# EAGLE board ECE445-Transmitter-Schematic (EAGLE 7.5.0)
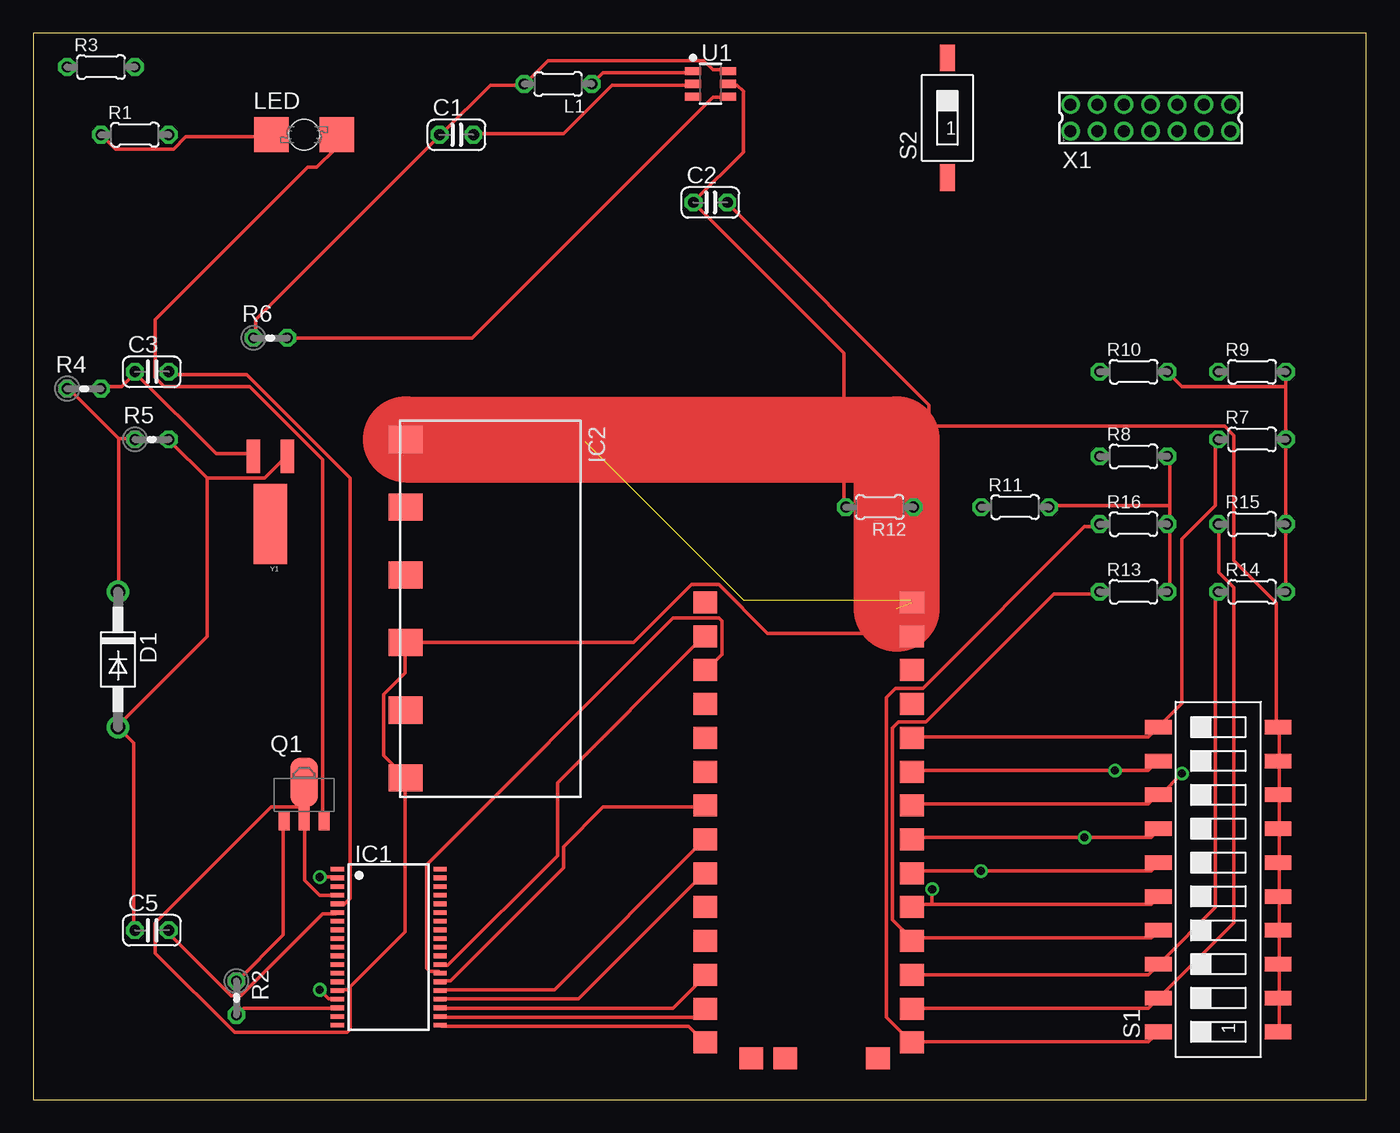
[diagram p0: board, top side]
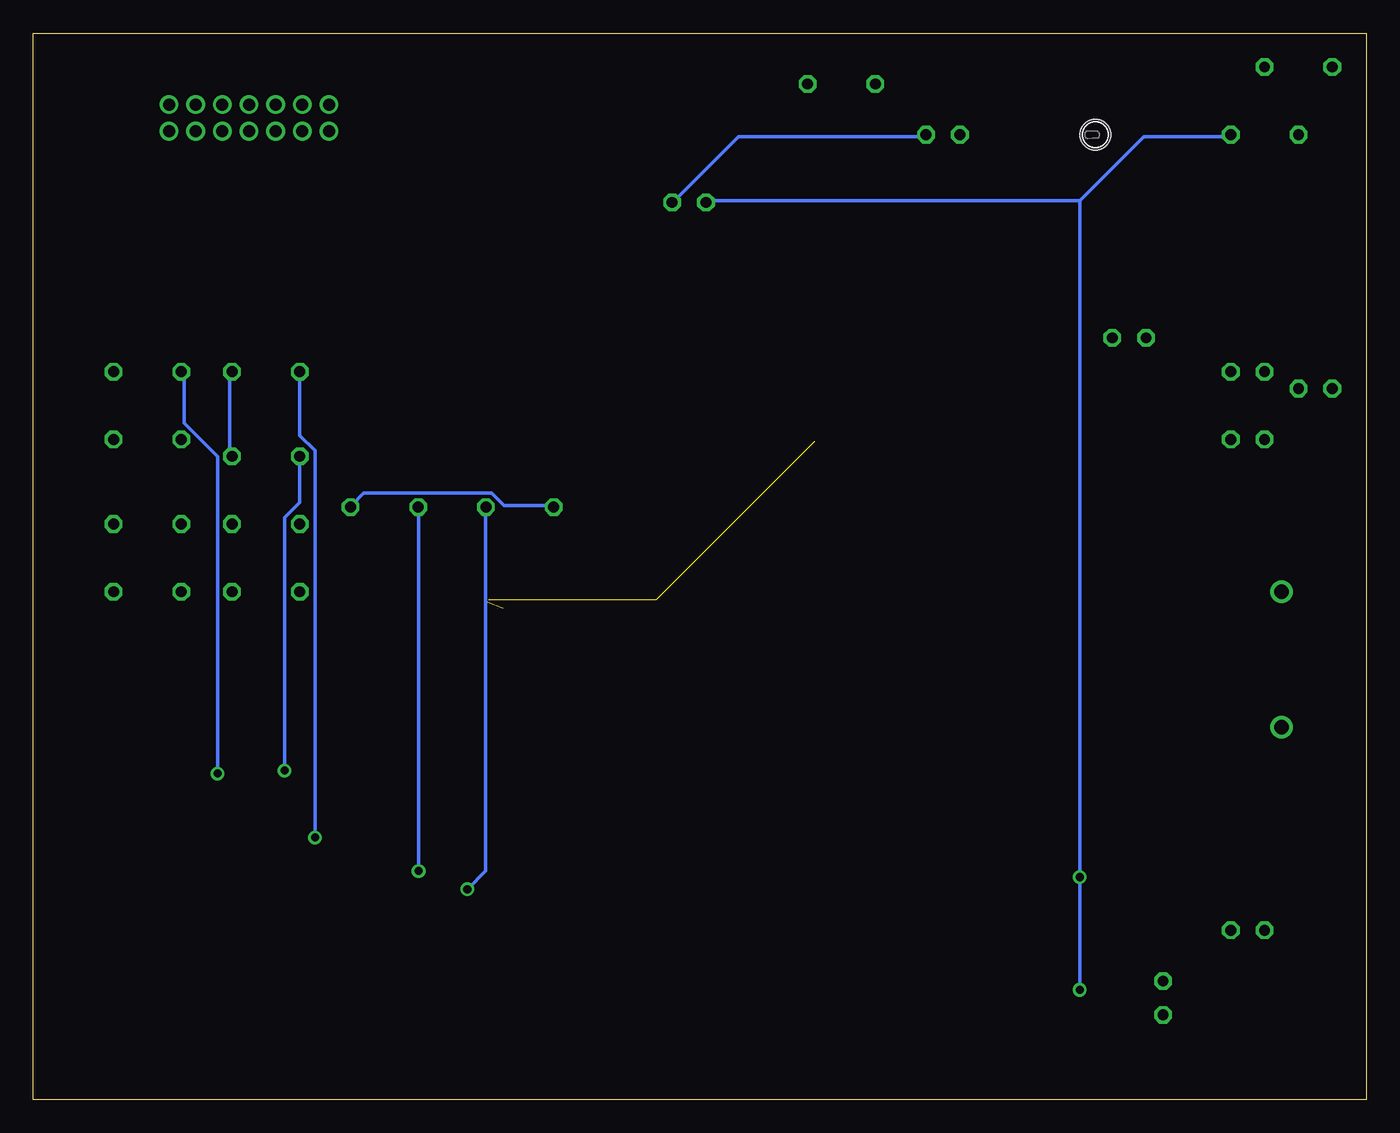
[diagram p1: board, bottom side, seen from below]

Size 100 x 80 mm. Coordinates in mm from the lower left corner, seen from the top.
Outline: 0,0 100,0 100,80 0,80 0,0
Copper layers (1*16): Top 0.035mm / dielectric 1.5mm / Bottom 0.035mm
Design rules "default": minimum track width 10mil, minimum drill 24mil, track to track 8mil, track to pad 8mil, pad to pad 8mil, via to via 8mil, smd to smd 8mil, copper to edge 40mil, drill to drill 8mil, minimum pad ring 10mil, minimum via ring 8mil, stop-mask expansion 4mil, vias tented up to drill 0mil, thermal gap 10mil

## Footprints (pad centres in the part's own frame; a part is rotated, then mirrored left to right if it is on the bottom)
C025-024X044 = drill 0.813 octagon: 1 -1.27,0; 2 1.27,0
DO41-10 = drill 1.118: A 5.08,0; C -5.08,0
TSSOP38_R-PDSO-G38-DA = smd 0.35 x 1: 1 -5.85,-3.85; 2 -5.2,-3.85; 3 -4.55,-3.85; 4 -3.9,-3.85; 5 -3.25,-3.85; 6 -2.6,-3.85; 7 -1.95,-3.85; 8 -1.3,-3.85; 9 -0.65,-3.85; 10 0,-3.85; 11 0.65,-3.85; 12 1.3,-3.85; 13 1.95,-3.85; 14 2.6,-3.85; 15 3.25,-3.85; 16 3.9,-3.85; 17 4.55,-3.85; 18 5.2,-3.85; 19 5.85,-3.85; 20 5.85,3.85; 21 5.2,3.85; 22 4.55,3.85; 23 3.9,3.85; 24 3.25,3.85; 25 2.6,3.85; 26 1.95,3.85; 27 1.3,3.85; 28 0.65,3.85; 29 0,3.85; 30 -0.65,3.85; 31 -1.3,3.85; 32 -1.95,3.85; 33 -2.6,3.85; 34 -3.25,3.85; 35 -3.9,3.85; 36 -4.55,3.85; 37 -5.2,3.85; 38 -5.85,3.85
ANT-XXX-SP = smd 2.032 x 2.54: 1 -12.7,0; 2 -7.62,0; 3 -2.54,0; 4 2.54,0; 5 7.62,0; 6 12.7,0
0204/5 = drill 0.813 octagon: 1 -2.54,0; 2 2.54,0
P47F-BOTTOM = smd 2.6 x 2.6: A -2.45,0; C 2.45,0 | hole 2.3: 0,0
SOT89 = smd 0.8 x 1.4: 1 -1.499,-1.981; 3 1.499,-1.981 | smd 0.8 x 1.9: 2 0,-1.727 | smd 2.032 x 3.65: 2@1 0,0.94
0204V = drill 0.813 octagon: 1 -1.27,0; 2 1.27,0
SMS-010 = smd 1.092 x 2.007: 1 -11.43,-4.496; 2 -8.89,-4.496; 3 -6.35,-4.496; 4 -3.81,-4.496; 5 -1.27,-4.496; 6 1.27,-4.496; 7 3.81,-4.496; 8 6.35,-4.496; 9 8.89,-4.496; 10 11.43,-4.496; 11 11.43,4.496; 12 8.89,4.496; 13 6.35,4.496; 14 3.81,4.496; 15 1.27,4.496; 16 -1.27,4.496; 17 -3.81,4.496; 18 -6.35,4.496; 19 -8.89,4.496; 20 -11.43,4.496
SMS-001 = smd 1.092 x 2.007: 1 0,-4.496; 2 0,4.496
TSOT-23-6 = smd 1.22 x 0.62: 1 -1.31,0.95; 2 -1.31,0; 3 -1.31,-0.95; 4 1.31,-0.95; 5 1.31,0; 6 1.31,0.95
KH3-RXM-LINX-315 = smd 1.78 x 1.65: 1 -8,19.52; 2 -8,16.98; 3 -8,14.44; 4 -8,11.9; 5 -8,9.36; 6 -8,6.82; 7 -8,4.28; 8 -8,1.74; 9 -8,-0.8; 10 -8,-3.34; 11 -8,-5.88; 12 -8,-8.42; 13 -8,-10.96; 14 -8,-13.5; 15 7.49,-13.5; 16 7.49,-10.96; 17 7.49,-8.42; 18 7.49,-5.88; 19 7.49,-3.34; 20 7.49,-0.8; 21 7.49,1.74; 22 7.49,4.28; 23 7.49,6.82; 24 7.49,9.36; 25 7.49,11.9; 26 7.49,14.44; 27 7.49,16.98; 28 7.49,19.52; 29 -4.55,-14.67; 30 -2.01,-14.67; 31 4.95,-14.67
87758-1416 = drill 0.9 pad 1.27: 1 -6,-1; 2 -6,1; 3 -4,-1; 4 -4,1; 5 -2,-1; 6 -2,1; 7 0,-1; 8 0,1; 9 2,-1; 10 2,1; 11 4,-1; 12 4,1; 13 6,-1; 14 6,1
CRYSTAL-32KHZ-SMD-MELF = smd 2.5 x 6: SHEILD 0,5.08 | smd 1 x 2.5: X1 -1.27,0; X2 1.27,0

## Placement (x,y rotation side)
C1  [C025-024X044]  31.75,72.39 0 top
C2  [C025-024X044]  50.8,67.31 0 top
C3  22 pF  [C025-024X044]  8.89,54.61 0 top
C5  22 pF  [C025-024X044]  8.89,12.7 0 top
D1  [DO41-10]  6.35,33.02 270 top
IC1  MSP430F2274IDA  [TSSOP38_R-PDSO-G38-DA]  26.67,11.43 270 top
IC2  ANT-XXX-SP  [ANT-XXX-SP]  27.94,36.83 270 top
L1  [0204/5]  39.37,76.2 180 top
LED  [P47F-BOTTOM]  20.32,72.39 0 top
Q1  [SOT89]  20.32,22.86 0 top
R1  1.3 kohm  [0204/5]  7.62,72.39 0 top
R2  10 kohm  [0204V]  15.24,7.62 270 top
R3  1.3 kohm  [0204/5]  5.08,77.47 0 top
R4  33 kohm  [0204V]  3.81,53.34 0 top
R5  100 Mohm  [0204V]  8.89,49.53 0 top
R6  100 Mohm  [0204V]  17.78,57.15 0 top
R7  1.3 kohm  [0204/5]  91.44,49.53 0 top
R8  1.3 kohm  [0204/5]  82.55,48.26 0 top
R9  1.3 kohm  [0204/5]  91.44,54.61 0 top
R10  1.3 kohm  [0204/5]  82.55,54.61 0 top
R11  1.3 kohm  [0204/5]  73.66,44.45 0 top
R12  1.3 kohm  [0204/5]  63.5,44.45 180 top
R13  1.3 kohm  [0204/5]  82.55,38.1 0 top
R14  1.3 kohm  [0204/5]  91.44,38.1 0 top
R15  1.3 kohm  [0204/5]  91.44,43.18 0 top
R16  1.3 kohm  [0204/5]  82.55,43.18 0 top
S1  SWS010  [SMS-010]  88.9,16.51 90 top
S2  SWS001  [SMS-001]  68.58,73.66 0 top
U1  AAT1217ICA-3.3-T1  [TSOT-23-6]  50.8,76.2 0 top
U$1  KH3-RXM-LINX-315  [KH3-RXM-LINX-315]  58.42,17.78 0 top
X1  87758-1416  [87758-1416]  83.82,73.66 0 top
Y1  [CRYSTAL-32KHZ-SMD-MELF]  17.78,48.26 180 top

## Library data of the parts
C1-C3 C5 L1 R1-R16 = rcl
D1 = diode
IC1 = texas; MPN: MSP430F2274IDA; OC_FARNELL: 1610179; OC_NEWARK: 28M6350
IC2 = linx; OC_FARNELL: unknown; OC_NEWARK: unknown
LED = led
Q1 = semicon-smd-ipc
S1 S2 = smd-special
U1 = Skyworks
U$1 = KH3-RXM-LINX-315
X1 = 14-pin-ribbon; MF: MOLEX; MPN: 87758-1416; OC_FARNELL: 7472358; OC_NEWARK: 59J1562
Y1 = SparkFun-FreqCtrl; PROD_ID: XTAL-07894

## Nets
+3V3: C1.1 L1.2 R6.1 U1.6
GND: C1.2 C2.2 IC1.4 IC1.15 IC2.4 IC2.6 Q1.2 Q1.2@1 S1.1 S1.2 S1.3 S1.4 S1.5 S1.6 S1.7 S1.8 S1.9 S1.10 U1.2 U$1.27
N$1: LED.C Q1.3
N$2: LED.A R1.1
N$3: IC1.17 R2.2
N$4: C5.2 IC1.6
N$5: C3.2 IC1.5
N$6: C3.1 R4.2 Y1.X2
N$7: Q1.1 R2.1
N$8: D1.C R4.1 R5.1
N$9: IC2.1 U$1.28
N$10: L1.1 U1.1
N$11: C2.1 IC1.2 IC1.16 R1.2 R7.2 R8.2 R9.2 R10.2 R11.2 R12.2 R13.2 R14.2 R15.2 R16.2 U1.5
N$12: C5.1 D1.A R5.2 Y1.X1
N$13: U$1.25
N$15: R15.1 S1.19 U$1.16
N$16: R14.1 S1.18 U$1.17
N$17: R13.1 S1.17 U$1.18
N$18: R12.1 S1.16 U$1.19
N$19: R6.2 U1.4
N$20: R11.1 S1.15 U$1.20
N$21: R10.1 S1.14 U$1.21
N$22: IC1.20 U$1.14
N$23: IC1.21 U$1.13
N$24: IC1.22 U$1.12
N$25: IC1.23 U$1.9
N$26: IC1.24 U$1.8
N$27: IC1.25 U$1.7
N$28: IC1.26 U$1.3
N$29: IC1.27 U$1.2
N$30: R9.1 S1.13 U$1.22
N$31: R8.1 S1.12 U$1.23
N$32: R7.1 S1.11 U$1.24
N$33: R16.1 S1.20 U$1.15

## Tracks (layer width: path | path; a pad name or v marks a point on that pad's centre or on a via)
+3V3
  Top 0.254: U1.6 51.89,77.27 50.98,77.27 50.29,77.95 38.63,77.95 37.03,76.35 L1.2 36.8,76.12 34.29,76.12 30.63,72.47 C1.1 30.4,72.24 16.69,58.52 16.69,57.15 R6.1
GND
  Top 0.254: IC1.4 22.63,15.32 21.49,15.32 20.34,16.46 20.34,21.03 Q1.2 | 20.34,21.95 20.34,21.26 Q1.2 | 20.34,21.95 20.34,23.77 Q1.2@1 | 23.77,8.46 27.89,12.57 27.89,24 IC2.6 27.89,24.23 26.29,25.83 26.29,30.4 27.89,32 27.89,34.29 IC2.4 45.03,34.29 49.38,38.63 51.44,38.63 55.09,34.98 65.84,34.98 U$1.27 66.06,34.98 67.21,36.12 67.21,50.52 | 23.77,8.46 23.55,8.23 22.86,8.23 IC1.15 | 20.34,21.95 17.83,21.95 9.14,13.26 9.14,10.97 15.09,5.03 23.55,5.03 23.77,5.26 23.77,8.46 | 20.34,21.95 Q1.2 | 93.5,22.86 93.5,25.38 S1.9 93.5,25.6 93.5,27.89 S1.10 93.27,28.12 93.27,37.26 90.07,40.46 90.07,49.84 89.38,50.52 67.21,50.52 | S1.1 93.5,5.26 93.5,7.54 S1.2 93.5,7.77 93.5,10.06 S1.3 93.5,10.29 93.5,12.57 S1.4 93.5,12.8 93.5,15.09 S1.5 93.5,15.32 93.5,17.6 S1.6 93.5,17.83 93.5,20.12 S1.7 93.5,20.34 93.5,22.86 | 93.5,22.86 S1.8 | U1.2 49.38,76.12 43.43,76.12 39.78,72.47 33.15,72.47 C1.2 | 67.21,50.52 67.21,52.12 52.12,67.21 C2.2
  Bottom 0.254: C1.2 33.15,72.24 47.09,72.24 51.89,67.44 C2.2
N$1
  Top 0.254: Q1.3 21.72,21.03 21.72,48.01 16.23,53.49 9.83,53.49 9.14,54.18 9.14,58.52 20.57,69.95 21.26,69.95 22.63,71.32 22.63,72.24 LED.C
N$2
  Top 0.254: LED.A 17.83,72.24 11.43,72.24 10.52,71.32 6.17,71.32 5.26,72.24 R1.1
N$3
  Top 0.254: IC1.17 22.63,6.86 15.77,6.86 15.32,6.4 R2.2
N$4
  Top 0.254: IC1.6 22.63,13.95 21.72,13.95 15.54,7.77 14.86,7.77 10.06,12.57 C5.2
N$5
  Top 0.254: IC1.5 22.86,14.63 23.32,14.63 23.77,15.09 23.77,46.63 16,54.41 10.29,54.41 C3.2
N$6
  Top 0.254: Y1.X2 16.46,48.46 13.72,48.46 7.77,54.41 C3.1 7.54,54.41 6.63,53.49 5.26,53.49 R4.2
N$7
  Top 0.254: Q1.1 18.75,20.8 18.75,12.34 15.32,8.91 R2.1
N$8
  Top 0.254: 6.4,49.61 7.54,49.61 R5.1 | 6.4,49.61 2.74,53.26 R4.1 | 6.4,49.61 6.4,38.18 D1.C
N$9  (3 unrouted)
  Top 0.254: 65.84,37.49 U$1.28 | 28.12,49.38 IC2.1
  Top 1.27: 28.12,49.38 27.94,49.38 IC2.1
  Top 6.452: IC2.1 64.77,49.53 64.77,36.83
N$10
  Top 0.254: L1.1 42.75,77.04 49.38,77.04 U1.1
N$11  (via drill 0.61)
  Top 0.254: R14.2 93.95,38.18 93.95,42.98 R15.2 93.95,43.2 93.95,49.38 R7.2 93.95,49.61 93.95,53.49 | 93.95,53.49 93.95,54.41 R9.2 | R13.2 85.27,38.18 85.27,42.98 R16.2 85.27,43.2 85.27,44.58 | 85.27,44.58 85.27,48.23 R8.2 | 85.27,44.58 76.35,44.58 R11.2 | 93.95,53.49 86.18,53.49 85.27,54.41 R10.2 | v21.49,8.23 22.17,7.54 22.63,7.54 IC1.16 | v21.49,16.69 22.63,16.69 IC1.2 | U1.5 52.12,76.12 52.81,76.12 53.26,75.67 53.26,71.09 49.61,67.44 C2.1 49.61,67.21 60.81,56.01 60.81,44.58 R12.2
  Bottom 0.254: R12.2 61.04,44.58 64.69,44.58 65.61,45.49 75.21,45.49 76.12,44.58 R11.2 | R10.2 85.27,54.41 85.27,48.46 R8.2 | v21.49,8.23 v21.49,16.69 21.49,67.44 | 21.49,67.44 16.69,72.24 10.29,72.24 R1.2 | 21.49,67.44 49.38,67.44 C2.1
N$12
  Top 0.254: 13.03,46.63 17.37,46.63 18.97,48.23 Y1.X1 | 13.03,46.63 10.29,49.38 R5.2 | C5.1 7.54,12.8 7.54,26.75 D1.A 6.4,28.12 13.03,34.75 13.03,46.63
N$15
  Top 0.254: U$1.16 66.06,6.86 83.67,6.86 84.35,7.54 S1.19 84.58,7.77 90.07,13.26 90.07,38.41 88.92,39.55 88.92,42.98 R15.1
N$16
  Top 0.254: U$1.17 66.06,9.37 83.67,9.37 84.35,10.06 S1.18 84.58,10.29 88.7,14.4 88.7,37.95 R14.1
N$17
  Top 0.254: S1.17 84.35,12.57 83.9,12.12 66.06,12.12 U$1.18 65.84,12.12 64.47,13.49 64.47,27.89 64.92,28.35 66.98,28.35 76.58,37.95 80.01,37.95 R13.1
N$18  (via drill 0.61)
  Top 0.254: 67.44,14.63 83.9,14.63 84.35,15.09 S1.16 | 67.44,14.63 66.06,14.63 U$1.19 | 67.44,14.63 v67.44,15.77
  Bottom 0.254: v67.44,15.77 66.06,17.14 66.06,44.35 R12.1
N$19
  Top 0.254: R6.2 32.92,57.15 50.98,75.21 51.89,75.21 U1.4
N$20  (via drill 0.61)
  Top 0.254: U$1.20 66.06,17.14 v71.09,17.14 83.9,17.14 84.35,17.6 S1.15
  Bottom 0.254: v71.09,17.14 71.09,44.35 R11.1
N$21  (via drill 0.61)
  Top 0.254: U$1.21 66.06,19.66 v78.87,19.66 83.9,19.66 84.35,20.12 S1.14
  Bottom 0.254: R10.1 80.01,49.84 78.87,48.69 v78.87,19.66
N$22
  Top 0.254: IC1.20 30.63,5.49 49.15,5.49 50.29,4.34 U$1.14
N$23
  Top 0.254: IC1.21 30.63,6.17 49.84,6.17 50.29,6.63 U$1.13
N$24
  Top 0.254: IC1.22 30.63,6.86 48.01,6.86 50.29,9.14 U$1.12
N$25
  Top 0.254: IC1.23 30.63,7.54 40.92,7.54 50.29,16.92 U$1.9
N$26
  Top 0.254: IC1.24 30.63,8.23 39.09,8.23 50.29,19.43 U$1.8
N$27
  Top 0.254: IC1.25 30.63,8.91 31.32,8.91 39.78,17.37 39.78,18.97 42.75,21.95 50.29,21.95 U$1.7
N$28
  Top 0.254: IC1.26 30.4,9.6 29.72,9.6 29.49,9.83 29.49,17.6 48.01,36.12 51.44,36.12 51.66,35.89 51.66,33.38 50.52,32.23 U$1.3
N$29
  Top 0.254: IC1.27 30.63,10.06 31.09,10.06 39.32,18.29 39.32,23.77 50.29,34.75 U$1.2
N$30  (via drill 0.61)
  Top 0.254: U$1.22 66.06,22.17 83.67,22.17 84.35,22.86 S1.13 84.58,22.86 v86.18,24.46
  Bottom 0.254: v86.18,24.46 86.18,48.23 88.7,50.75 88.7,54.41 R9.1
N$31  (via drill 0.61)
  Top 0.254: U$1.23 66.06,24.69 v81.15,24.69 83.67,24.69 84.35,25.38 S1.12
  Bottom 0.254: R8.1 80.01,44.81 81.15,43.66 v81.15,24.69
N$32
  Top 0.254: U$1.24 66.06,27.2 83.67,27.2 S1.11 86.18,29.72 86.18,42.06 88.7,44.58 88.7,49.38 R7.1
N$33
  Top 0.254: S1.20 83.67,4.34 66.06,4.34 U$1.15 65.84,4.34 64.01,6.17 64.01,30.18 64.69,30.86 66.75,30.86 78.87,42.98 80.01,42.98 R16.1